# Altium PCB shutter switch.PcbDoc
Units mil, origin at the board's own origin, x right, y up, seen from the top; angles counter-clockwise.
Board outline 6000 x 4000 mil, 2 copper layers (Top Layer, Bottom Layer); 48 components, 25 nets, 125 pads, 0 vias.
Unrouted connection lines stored in the file: 87.
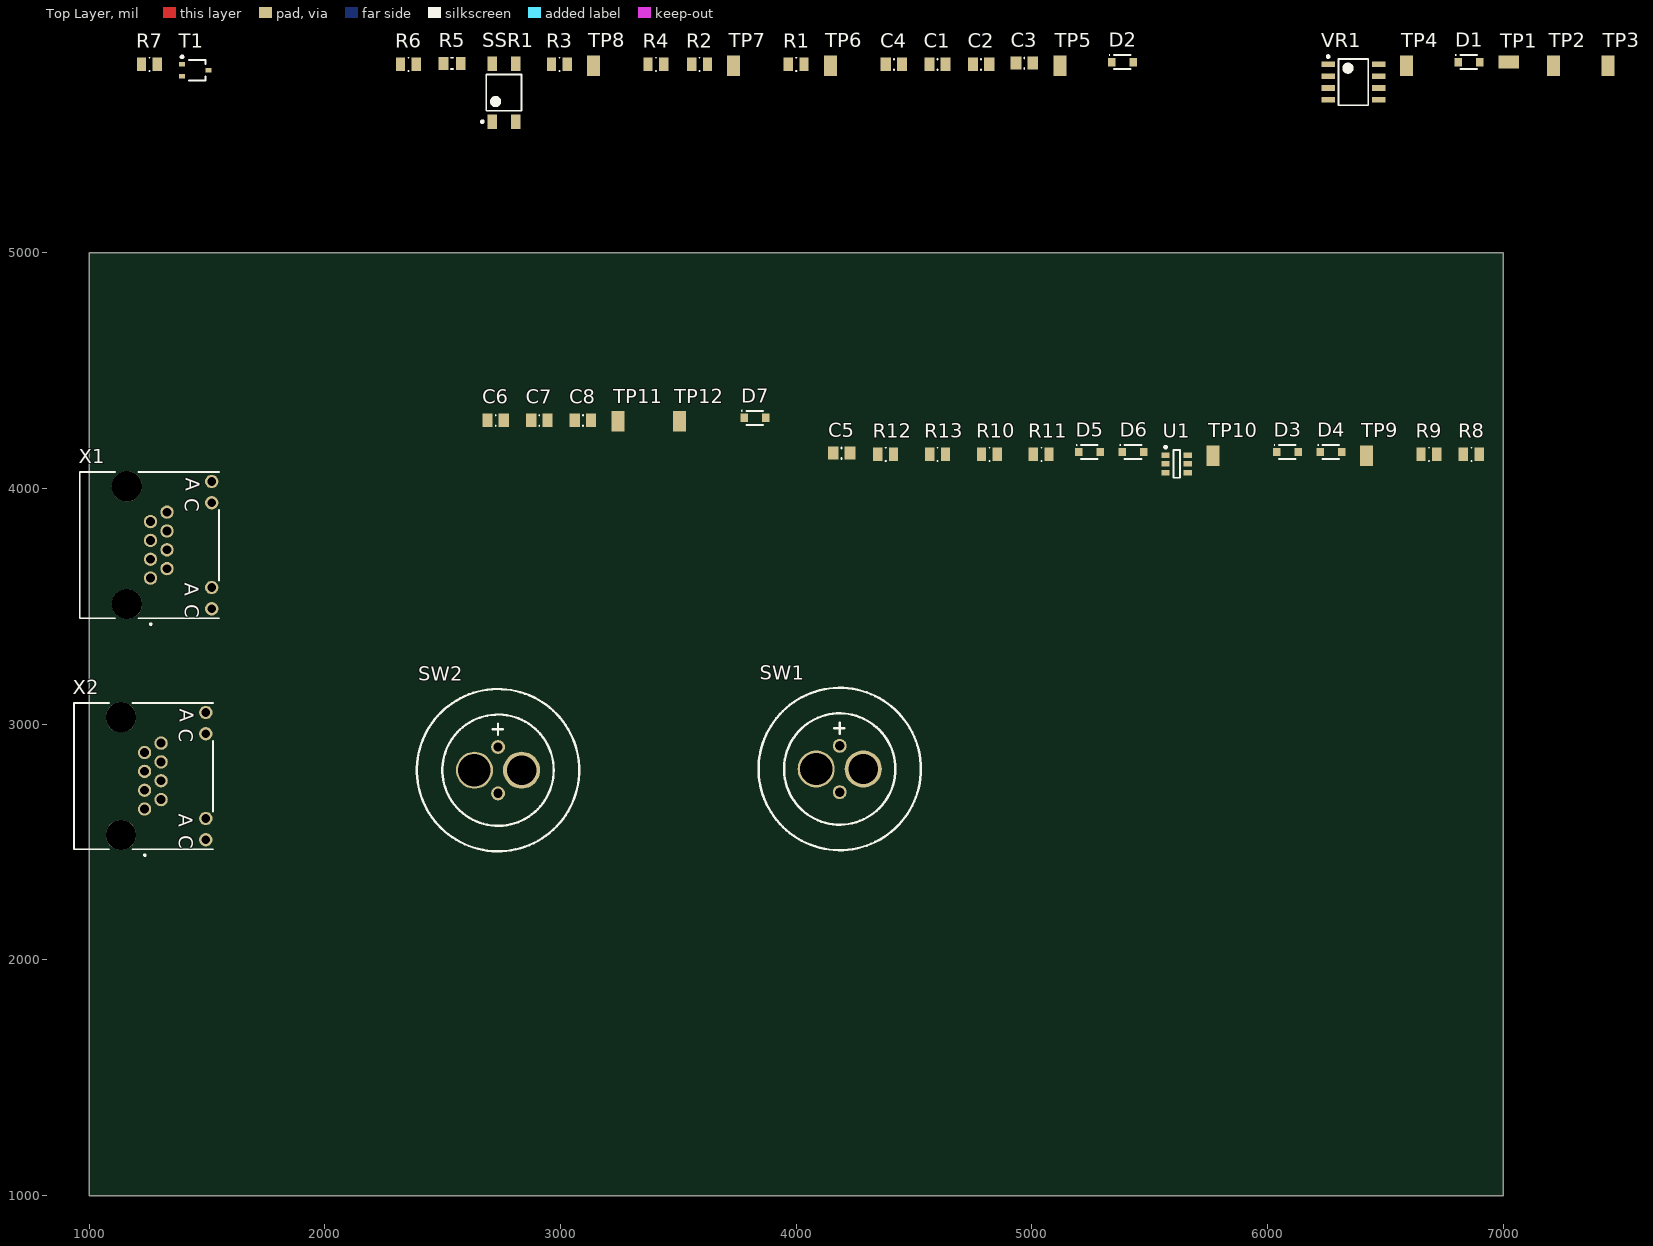
[diagram p0: Top Layer view]
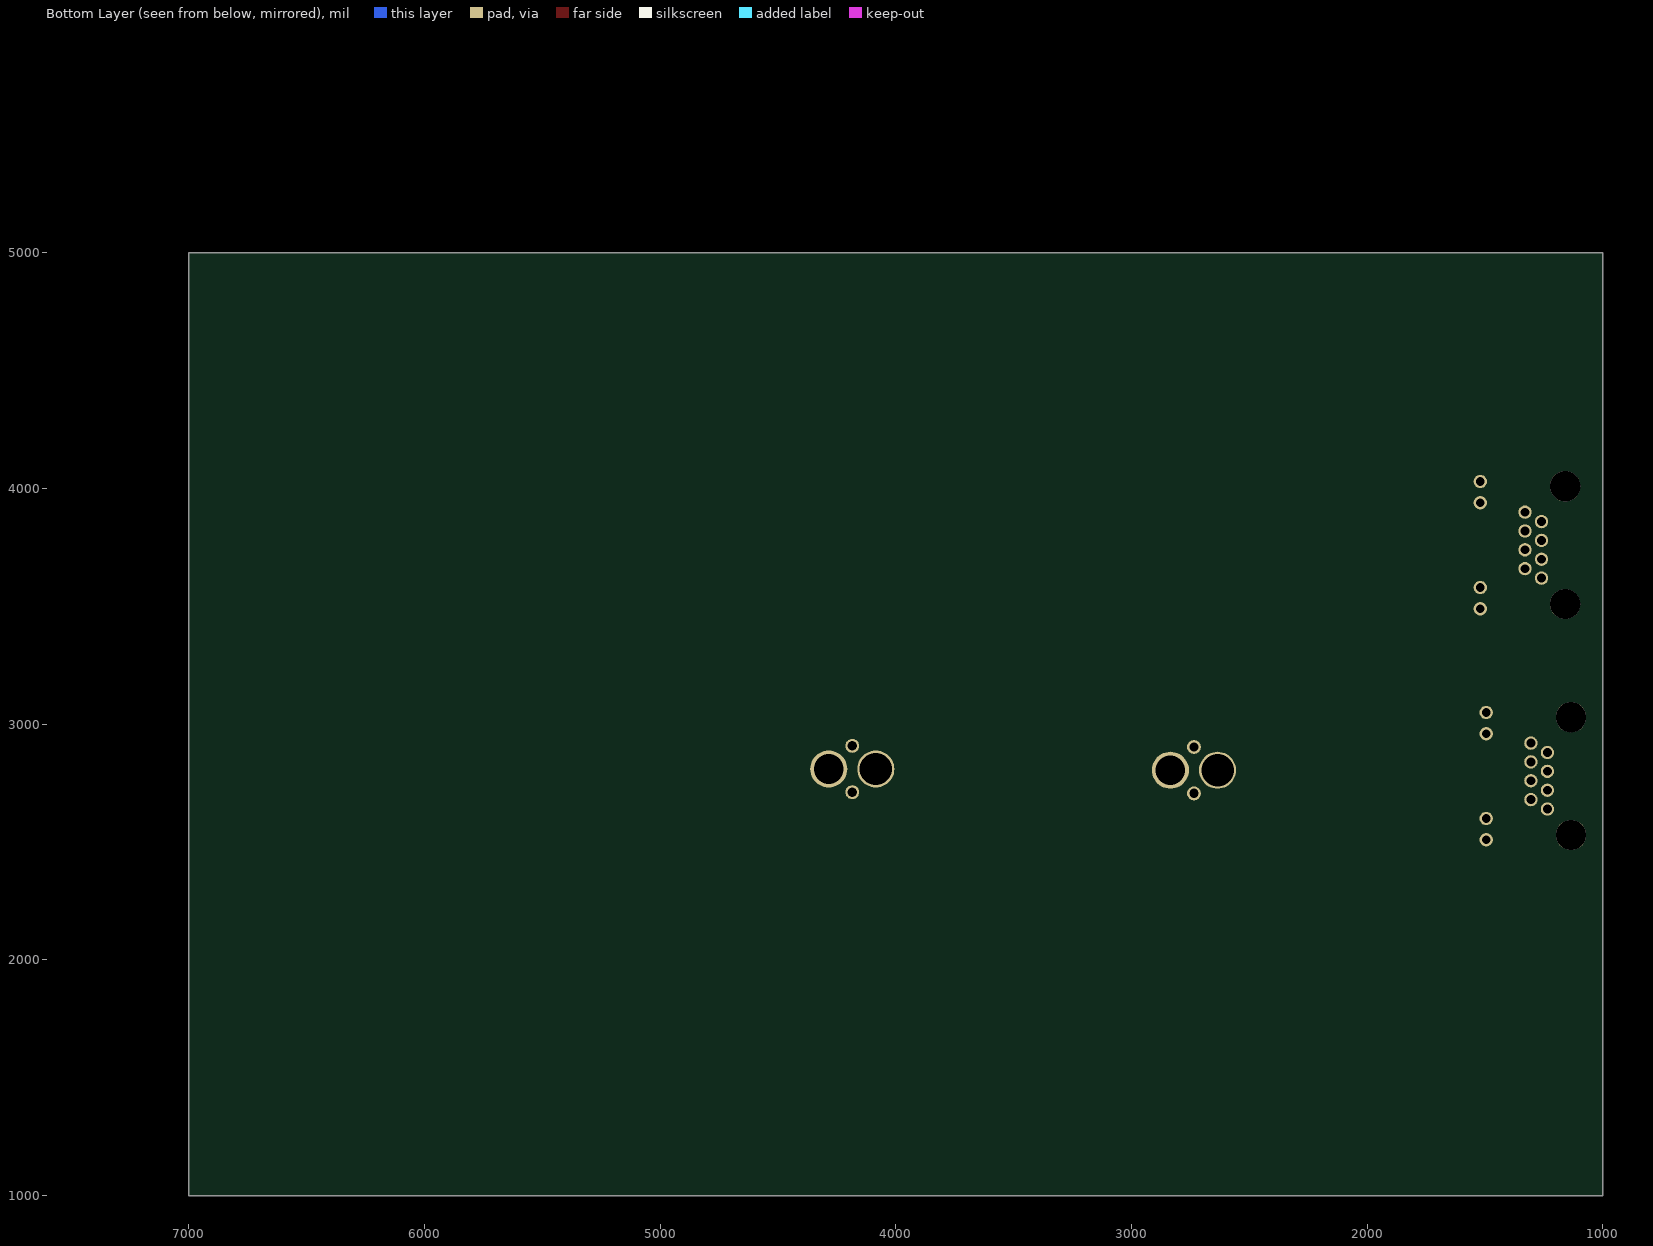
[diagram p1: Bottom Layer view, seen from below]

## Layer stack, top to bottom
Top Solder: solder mask 0.4, Solder Resist, Dk 3.5
Top Layer: signal copper 1.4
Dielectric 1: dielectric 12.6, FR-4, Dk 4.8
Bottom Layer: signal copper 1.4
Bottom Solder: solder mask 0.4, Solder Resist, Dk 3.5

## Board outline
1000,1000 7000,1000 7000,5000 1000,5000

## Design rules (kind name [scope] priority, off if disabled: settings)
Clearance [All] p1: gap=10 ignorepadtopadclearanceinfootprint=FALSE except(0: Arc-Hole Track-Hole SMDPad-Hole THPad-Hole Via-Hole Fill-Hole Poly-Hole Region-Hole Text-Hole)
PolygonConnect [All] p1: connectstyle=Relief reliefconductorwidth=10 reliefentries=4 polygonreliefangle="90 Angle" airgapwidth=10
RoutingVias [All] p1: holewidth=28 width=50 viastyle="Through Hole" minholewidth=28 minwidth=50 maxholewidth=28 maxwidth=50
SolderMaskExpansion [All] p1: expansion=4
Width [All] p1: maxlimit=10 minlimit=10 preferedwidth=10
30 further rules are at their usual default settings.

## Components (designator, comment, footprint, x,y, rotation, side; value= is the part's Value field where it differs from the comment)
C1 "4u7" Murata_Chip2PinSM127P600-8N 4600,5800 r0 top
C2 "4u7" Murata_Chip2PinSM127P600-8N 4785,5800 r0 top
C3 "100nf" "Multicomp capacitor 0805 Chip2PinSM127P600-8N" 5110,5695 r0 top
C4 "4u7" Murata_Chip2PinSM127P600-8N 4415,5800 r0 top
C5 "100nf" "Multicomp capacitor 0805 Chip2PinSM127P600-8N" 4335,4040 r0 top
C6 "4u7" Murata_Chip2PinSM127P600-8N 2725,4290 r0 top
C7 "4u7" Murata_Chip2PinSM127P600-8N 2910,4290 r0 top
C8 "4u7" Murata_Chip2PinSM127P600-8N 3095,4290 r0 top
D1 "1N914BWS" 1N914BWS 6855,5810 r0 top
D2 "1N914BWS" 1N914BWS 5385,5810 r0 top
D3 "1N914BWS" 1N914BWS 6085,4155 r0 top
D4 "1N914BWS" 1N914BWS 6270,4155 r0 top
D5 "1N914BWS" 1N914BWS 5245,4155 r0 top
D6 "1N914BWS" 1N914BWS 5430,4155 r0 top
D7 "1N914BWS" 1N914BWS 3825,4300 r0 top
R1 "1k" "Multicomp 0805 Chip2PinSM127P600-8N" 4000,5800 r0 top
R2 "100k" "Multicomp 0805 Chip2PinSM127P600-8N" 3590,5800 r0 top
R3 "1k" "Multicomp 0805 Chip2PinSM127P600-8N" 2995,5800 r0 top
R4 "100k" "Multicomp 0805 Chip2PinSM127P600-8N" 3405,5800 r0 top
R5 "470" "Resistor 0805 YAGEO CAPC2012X06N" 2540,5805 r0 top
R6 "10k" "Multicomp 0805 Chip2PinSM127P600-8N" 2355,5800 r0 top
R7 "10k" "Multicomp 0805 Chip2PinSM127P600-8N" 1255,5800 r0 top
R8 "1k" "Multicomp 0805 Chip2PinSM127P600-8N" 6865,4145 r0 top
R9 "1k" "Multicomp 0805 Chip2PinSM127P600-8N" 6685,4145 r0 top
R10 "100k" "Multicomp 0805 Chip2PinSM127P600-8N" 4820,4145 r0 top
R11 "100k" "Multicomp 0805 Chip2PinSM127P600-8N" 5040,4145 r0 top
R12 "1k" "Multicomp 0805 Chip2PinSM127P600-8N" 4380,4145 r0 top
R13 "1k" "Multicomp 0805 Chip2PinSM127P600-8N" 4600,4145 r0 top
SSR1 "G3VM-41GR8" G3VM-41GR8 2760,5680 r90 top
SW1 "(NO)" "MCPA switch" 4185,2810 r0 top
SW2 "(NO)" "MCPA switch" 2735,2805 r0 top
T1 "DMG1012UW" SOT65P255X100-3N 1450,5775 r0 top
TP1 "VX2" S2751-46R 7025,5810 r0 top
TP2 "VX1" S2751-46R 7215,5795 r90 top
TP3 "Vin" S2751-46R 7445,5795 r90 top
TP4 "5V" S2751-46R 6590,5795 r90 top
TP5 "Rem1" S2751-46R 5120,5795 r90 top
TP6 "Rem2" S2751-46R 4145,5795 r90 top
TP7 "0V" S2751-46R 3735,5795 r90 top
TP8 "0V" S2751-46R 3140,5795 r90 top
TP9 "^OUT" S2751-46R 6420,4140 r90 top
TP10 "SW" S2751-46R 5770,4140 r90 top
TP11 "CLR" S2751-46R 3245,4285 r90 top
TP12 "OUT" S2751-46R 3505,4285 r90 top
U1 "MAX16054AZT+" Z6+1_L 5615,4105 r0 top
VR1 "MIC5239-5.0" SOIC127P600X173-8N 6365,5725 r0 top
X1 "RJHS-4081" RJHS-4081 1260.83,3619.17 r270 top
X2 "RJHS-4081" RJHS-4081 1235.83,2639.02 r270 top

## Footprints (in the part's own frame and the unit in brackets; to place one, negate y for a bottom-side part, rotate by r counter-clockwise, add the part's x,y. Pads: shape width x height; smd on the part's side, far side on the other; paste and mask are expansions set on the pad)
1N914BWS [mm] "Signal Diode"
  rect 0.8x0.9 smd: 1(-1.15,0) 2(1.15,0)
  silkscreen extent -1.45,-0.76 0.89,0.81, body extent -1.25,-0.67 1.25,0.67, height 0.9
G3VM-41GR8 [mm] "SOP, 4-Leads, Body 3.90x4.40mm, Pitch 2.54mm, IPC Medium Density"
  rect 1.55x1 smd: 1(-3.125,1.27) 2(-3.125,-1.27) 3(3.125,-1.27) 4(3.125,1.27)
  silkscreen extent -3.25,-1.9 1.95,2.44, body extent -3.45,-2.05 3.45,2.05, height 2.1
"MCPA switch" [mm] "push button non latching single pole illuminated 50V 125ma"
  round 4 hole 3.5: 1(-2.54,0)
  round 4 hole 3.2: 2(2.54,0)
  round 1.5 hole 1: 3(0,2.5) 4(0,-2.5)
  silkscreen extent -8.75,-8.75 8.75,8.75, body extent -8.75,-9.5 9.5,8.75, height 18.95
"Multicomp 0805 Chip2PinSM127P600-8N" [mm] "mcwr08 series 0805 resistor"
  rect 1x1.45 smd: 1(-0.85,0) 2(0.85,0)
  silkscreen extent 0,-0.72 0.03,0.72, body extent -1.05,-0.67 1.05,0.67, height 0.65
"Multicomp capacitor 0805 Chip2PinSM127P600-8N" [mm] "0805 capacitor"
  rect 1.15x1.4 smd: 1(-4.5,2.8) 2(-2.7,2.8)
  silkscreen extent -3.6,2.17 -3.6,3.4, body extent -4.68,2.13 -2.53,3.48, height 1.35
Murata_Chip2PinSM127P600-8N [mm] "Murata 0805 capacitor"
  rect 1.1x1.45 smd: 1(-0.875,0) 2(0.875,0)
  silkscreen extent 0,-0.63 0,0.6, body extent -1.07,-0.7 1.07,0.7, height 1.4
"Resistor 0805 YAGEO CAPC2012X06N" [mm] "Chip Capacitor, 2-Leads, Body 2.00x1.25mm, IPC Medium Density"
  rect 1.05x1.4 smd: 1(-0.925,0) 2(0.925,0)
  silkscreen extent -0.1,-0.6 0.1,0.6, body extent -1.05,-0.67 1.05,0.67, height 0.6
RJHS-4081 [mm] "Amphenol Female RJ45 Connector Right Angle Through Hole"
  round 1.44 hole 0.94: 1(-0.027,-0.021) 2(-1.047,1.759) 3(-2.057,-0.021) 4(-3.077,1.759) 5(-4.087,-0.021) 6(-5.107,1.759) 7(-6.117,-0.021) 8(-7.137,1.759) 9(3.283,6.579) 10(0.993,6.579) 11(-8.147,6.579) 12(-10.437,6.579)
  round 3.27 hole 3.27 unplated: 13(-9.927,-2.561) 14(2.773,-2.561)
  silkscreen extent -11.45,-7.64 5.04,7.35, body extent -11.51,-8.02 4.23,7.37, height 12.84
S2751-46R [mm] "SMD Test Point"
  rect 2.2x1.4 smd: 1(0,0)
  body extent -1,-0.55 1,0.65, height 1.42
SOIC127P600X173-8N [mm] "SOIC, 8-Leads, Body 4.92x3.90mm, Pitch 1.27mm, IPC Medium Density"
  rect 1.45x0.6 smd: 1(-2.725,1.905) 2(-2.725,0.635) 3(-2.725,-0.635) 4(-2.725,-1.905) 5(2.725,-1.905) 6(2.725,-0.635) 7(2.725,0.635) 8(2.725,1.905)
  silkscreen extent -2.85,-2.5 1.6,2.88, body extent -3,-2.5 3,2.5, height 1.73
SOT65P255X100-3N [mm] "SOT323, 3-Leads, Body 2.00x2.55mm, Pitch 0.65mm, IPC Medium Density"
  rect 0.65x0.5 smd: 1(-1.425,0.65) 2(-1.425,-0.65) 3(1.425,0)
  silkscreen extent -1.55,-1.1 1.1,1.57, body extent -1.39,-1.1 1.39,1.1, height 1
Z6+1_L [mm] "SOT23, 6-Leads, Body 2.9x1.6mm, Pitch 0.95mm, Lead Span 2.8mm, IPC High Density"
  rect 0.9x0.6 smd: 1(-1.2,0.95) 2(-1.2,0) 3(-1.2,-0.95) 4(1.2,-0.95) 5(1.2,0) 6(1.2,0.95)
  silkscreen extent -1.32,-1.5 0.35,1.92, body extent -0.82,-1.5 0.82,1.5, height 1.1

## Part data
C1 C2 C4 C6 C7 C8: library part "4.7U 0805", Supplier Part Number 1=2611942, Supplier 1=Farnell
C3 C5: library part "100nf 0805", "100nf 0805", Supplier Part Number 1=1759265RL, Supplier 1=Farnell
D1 D2 D3 D4 D5 D6 D7: Supplier Part Number 1=2453274, Supplier 1=Farnell
R1 R3 R8 R9 R12 R13: library part "1k OHM Resistor 0805", "Resistor 0805 Multicomp STOCKED", Supplier Part Number 1=2447587, Supplier 1=Farnell
R2 R4 R10 R11: library part "100k OHM Resistor 0805", "100k 0805 MCWR series", Supplier Part Number 1=2446868, Supplier 1=Farnell
R5: library part "470 OHM Resistor 0805", "Resistor 0805 YAGEO RC Series STOCKED", Supplier Part Number 1=9233962, Supplier 1=Farnell
R6 R7: library part "10k OHM Resistor 0805", "Resistor 0805 Multicomp MCWR08 Series STOCKED", Supplier Part Number 1=2447553, Supplier 1=Farnell
SSR1: library part SSR_G3VM-41GR8, "opto isolated SSR bidirectional mosfet relay", Supplier Part Number 1=2065749, Supplier 1=Farnell
SW1 SW2: library part MCPAS6-B2-M1CES2-5L6, "push button  (no) 50v 125ma", Supplier Part Number 1=2146911, Supplier 1=Farnell, Supplier 2=Newark, Supplier 3=Element14, Supplier Part Number 2=28W1907, Supplier Part Number 3=2146911
T1: library part DMG1012UW-7, "mosfet N chan enhancement-vds max 20v-id=1a", Supplier Part Number 1=DMG1012UW-7DIDKR-ND, Supplier 1=Digi-Key, Supplier 2=Mouser, Supplier 3=RSComponents, Supplier Part Number 2=621-DMG1012UW-7, Supplier Part Number 3=751-4073
TP1 TP2 TP3 TP4 TP5 TP6 TP7 TP8 TP9 TP10 TP11 TP12: library part S2751-46R, "Medium SMD Micro Test Point", Supplier Part Number 1=952-2664-6-ND, Supplier 1=Digi-Key, Supplier 2=Newark, Supplier 3=Mouser, Supplier Part Number 2=76Y5390, Supplier Part Number 3=855-S2751-46R
U1: library part CMP-0251-00628-1, "On/Off Controller with Debounce and +/-15kV ESD Protection, 6-Pin SOT, -40°C to +125°C, Pb-Free", Code_JEDEC=MO-193*, Code_JEITA=SC-74, ComponentLink1Description="Manufacturer URL", ComponentLink1URL=http://www.maxim-ic.com, ComponentLink2Description=Datasheet, ComponentLink2URL=http://datasheets.maxim-ic.com/en/ds/MAX16054.pdf, ComponentLink3Description="Package Specification", ComponentLink3URL=http://pdfserv.maxim-ic.com/package_dwgs/21-0114.PDF, DatasheetVersion="Rev 0, May-2008", PackageDescription="6-Pin Thin Small-Outline Transistor, 2.9 x 1.6 mm Body, 0.95 mm Pitch, 2.8 mm Lead Span, SOT-23, Pb-Free", PackageReference=z6+1, PackageVersion="revD, 2011"
VR1: library part MIC5239-5.0YS, "5v 500ma voltage regulator with enable and FLAG", Supplier Part Number 1=2510293, Supplier 1=Farnell, Supplier 2=RSComponents, Supplier Part Number 2=1770462
X1 X2: library part RJ45_RJHS-4081, "Amphenol Female RJ45 Connector Right Angle Through Hole", Supplier Part Number 1=257-8779, Supplier 1=RSComponents

## Nets (pads, with @x,y where several pads share a name; then routed paths per layer and width w, separated by ;. In a path a pad name is that pad's centre, name@x,y a point inside that pad or via, vN(x,y) a via of type N, cw(c..) or ccw(c..) an arc to the next point about the centre after c; other vN are vias at no path point)
0V: C1.2 C2.2 C3.2 C4.2 C5.1 C6.2 C7.2 C8.2 D7.2 R2.2 R4.2 R7.1 SW1.1 SW1.4 SW2.4 T1.2 TP7.1 TP8.1 U1.2 VR1.5 X1.2 X1.9 X1.11 X2.2 X2.9 X2.11
5V: C2.1 C3.1 C5.2 R5.2 R6.2 TP4.1 U1.6 VR1.4
closed1: D3.2 R1.2 X1.6
closed2: D5.2 R8.2 X2.6
NetC4_1: C4.1 D1.1 D2.1 TP3.1 VR1.1 VR1.3
NetC6_1: C6.1 C7.1 C8.1 D7.1 R11.1 TP11.1 U1.3
NetD1_2: D1.2 R2.1 SSR1.4 TP2.1 X1.1
NetD2_2: D2.2 R4.1 SSR1.3 TP1.1 X2.1
NetD3_1: D3.1 D5.1 R12.2
NetD4_1: D4.1 D6.1 R13.2
NetR1_1: R1.1 X1.10
NetR3_1: R3.1 X1.12
NetR5_1: R5.1 SSR1.1
NetR6_1: R6.1 SSR1.2 T1.3
NetR7_2: R7.2 T1.1 TP9.1 U1.4
NetR8_1: R8.1 X2.10
NetR9_1: R9.1 X2.12
NetR10_1: R10.1 R11.2
NetR10_2: R10.2 TP12.1 U1.5
NetR12_1: R12.1 SW2.3
NetR13_1: R13.1 SW1.3
NetSW1_2: SW1.2 TP10.1 U1.1
open1: D4.2 R3.2 X1.5
open2: D6.2 R9.2 X2.5
rem: SW2.1 SW2.2 TP5.1 TP6.1 X1.3 X1.4 X2.3 X2.4
pads on no net: C1.1 VR1.2 VR1.6 VR1.7 VR1.8 X1.7 X1.8 X1.13 X1.14 X2.7 X2.8 X2.13 X2.14

## Text inside footprints (layer, text, board x,y; h text height)
X1: Top Overlay "C" at 1405,3960 h60 r270; Top Overlay "C" at 1405,3510 h60 r270; Top Overlay "A" at 1405,3600 h60 r270; Top Overlay "A" at 1410,4045 h60 r270
X2: Top Overlay "C" at 1380,2979.84 h60 r270; Top Overlay "C" at 1380,2529.84 h60 r270; Top Overlay "A" at 1380,2619.84 h60 r270; Top Overlay "A" at 1385,3064.84 h60 r270